# EAGLE board charlieplex_12_v1 (EAGLE 5.11)
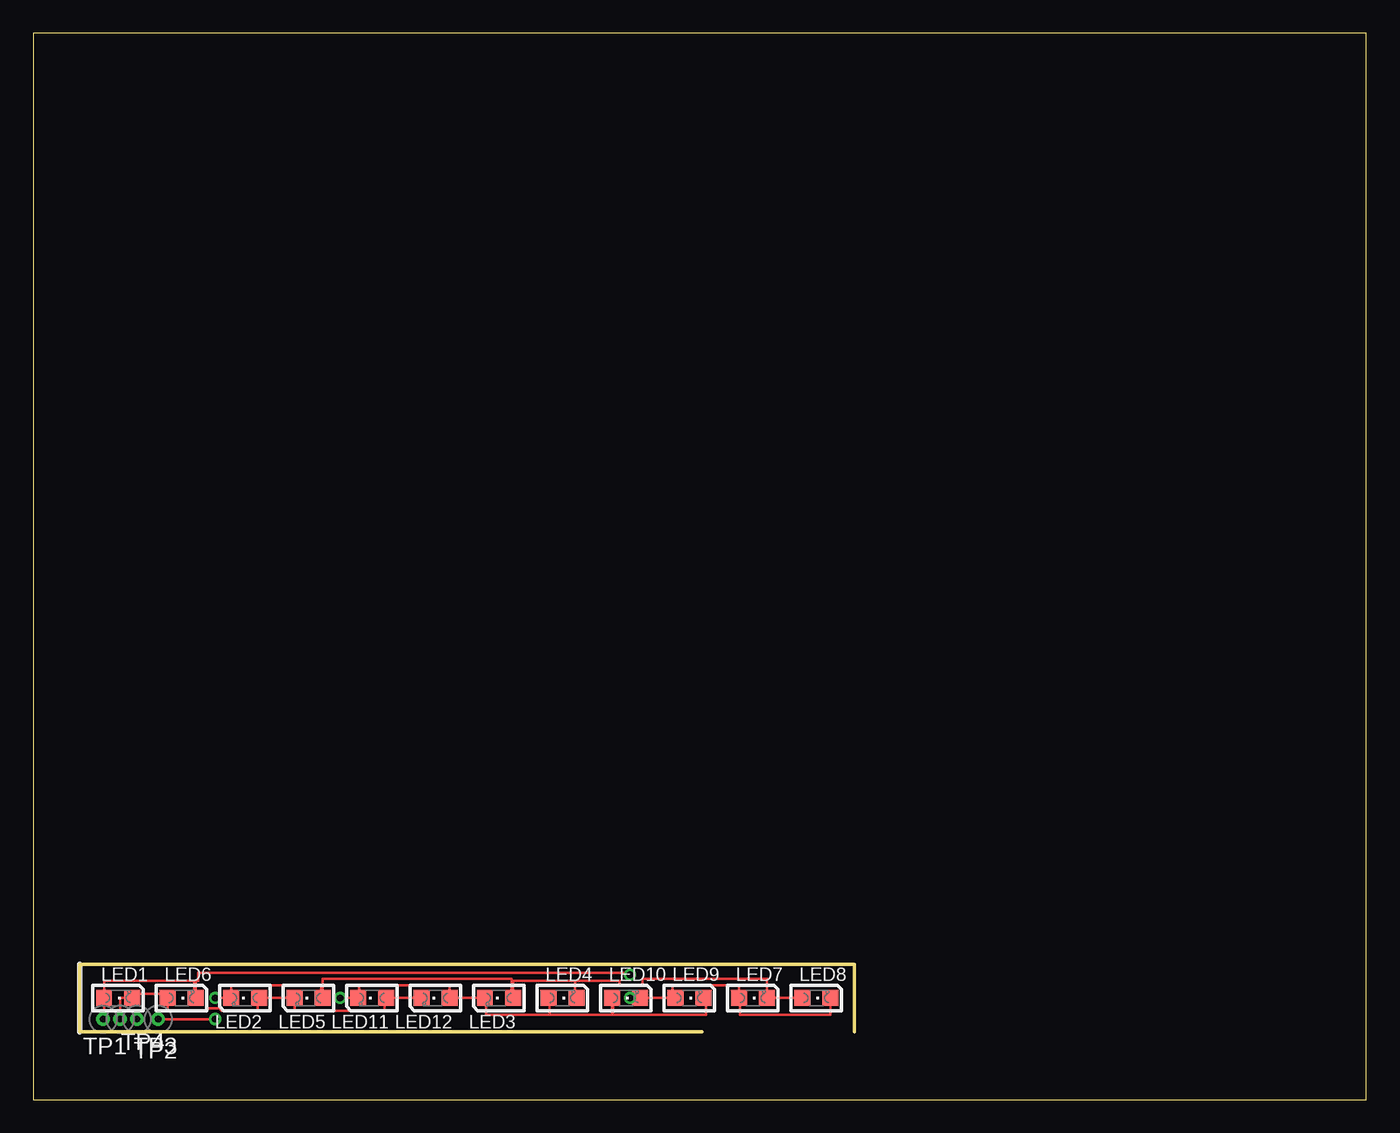
[diagram p0: board, top side]
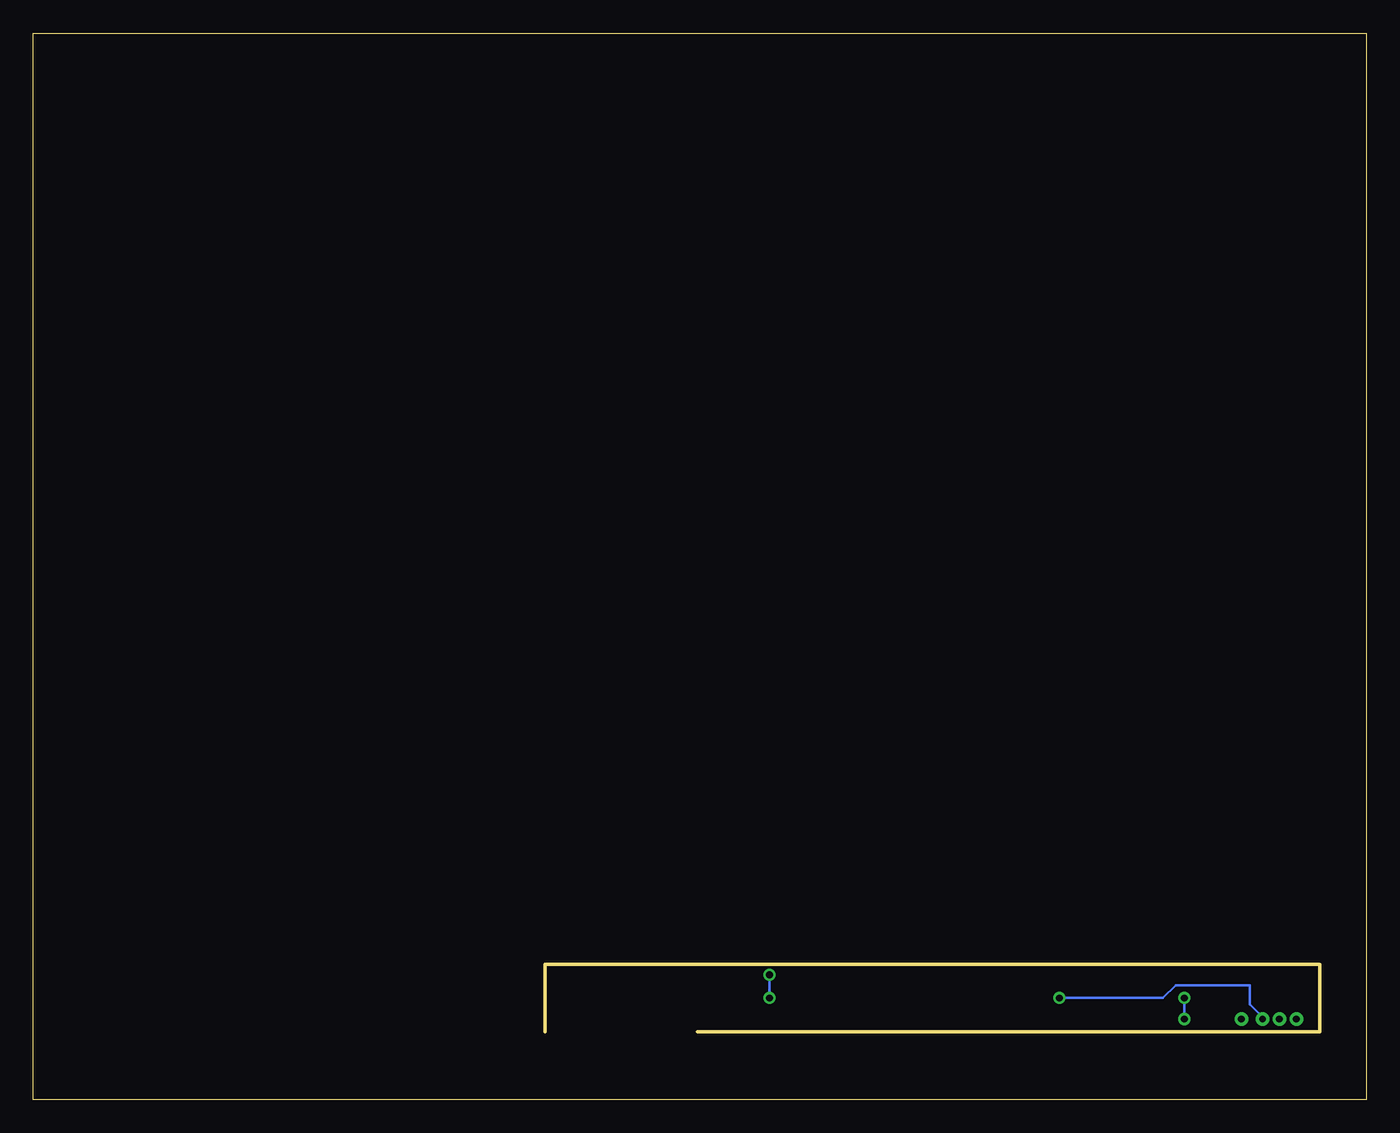
[diagram p1: board, bottom side, seen from below]

Size 100 x 80 mm. Coordinates in mm from the lower left corner, seen from the top.
Outline: 61.59,5.08 61.59,10.16 3.49,10.16 3.49,5.08 50.16,5.08
Outline: 0,0 100,0 100,80 0,80 0,0
Copper layers (1*16): Top 0.035mm / dielectric 1.5mm / Bottom 0.035mm
Design rules "default *": minimum track width 8mil, minimum drill 20mil, track to track 8mil, track to pad 8mil, pad to pad 8mil, via to via 8mil, smd to smd 8mil, copper to edge 40mil, drill to drill 8mil, minimum pad ring 10mil, minimum via ring 8mil, stop-mask expansion 4mil, vias tented up to drill 0mil, thermal gap 10mil

## Footprints (pad centres in the part's own frame; a part is rotated, then mirrored left to right if it is on the bottom)
LED_0805 = smd 1.2 x 1.2: A 0,-1.05; C 0,1.05
P1-20 = drill 0.508 round: TP 0,0

## Placement (x,y rotation side)
LED1  [LED_0805]  6.35,7.62 270 top
LED2  [LED_0805]  15.88,7.62 90 top
LED3  [LED_0805]  34.92,7.62 90 top
LED4  [LED_0805]  39.69,7.62 270 top
LED5  [LED_0805]  20.64,7.62 90 top
LED6  [LED_0805]  11.11,7.62 270 top
LED7  [LED_0805]  53.98,7.62 270 top
LED8  [LED_0805]  58.74,7.62 270 top
LED9  [LED_0805]  49.21,7.62 270 top
LED10  [LED_0805]  44.45,7.62 270 top
LED11  [LED_0805]  25.4,7.62 90 top
LED12  [LED_0805]  30.16,7.62 90 top
TP1  [P1-20]  5.24,6.03 0 top
TP2  [P1-20]  6.51,6.03 0 top
TP3  [P1-20]  9.37,6.03 0 top
TP4  [P1-20]  7.78,6.03 0 top

## Library data of the parts
LED1-LED12 TP1-TP4 = CyberRailGuru

## Nets
N$1: LED1.A LED6.C LED7.A LED8.C LED9.A LED10.C TP1.TP
N$2: LED1.C LED2.A LED5.C LED6.A LED11.A LED12.C TP2.TP
N$5: LED2.C LED3.A LED4.C LED5.A LED7.C LED8.A TP3.TP
N$6: LED3.C LED4.A LED9.C LED10.A LED11.C LED12.A TP4.TP

## Tracks (layer width: path | path; a pad name or v marks a point on that pad's centre or on a via)
N$1  (via drill 0.51)
  Top 0.203: LED8.C 59.79,6.35 53.02,6.35 53.02,7.62 LED7.A 52.92,8.57 47.94,8.57 47.94,7.62 LED9.A LED10.C v44.77,7.62 | v44.77,9.37 44.77,9.53 12.38,9.53 12.38,8.89 12.16,8.89 LED6.C 12.06,7.62 12.06,8.89 5.3,8.89 LED1.A 5.3,6.03 TP1.TP
  Bottom 0.203: v44.77,9.37 v44.77,7.62
N$2
  Top 0.203: 7.3,7.62 7.3,7.94 10.16,7.94 10.16,7.62 LED6.A 10.06,6.67 13.02,6.67 13.18,6.83 13.97,6.83 14.13,6.67 16.83,6.67 16.83,7.62 LED2.A LED5.C 19.59,6.67 26.35,6.67 26.35,7.62 LED11.A LED12.C | 7.3,7.62 LED1.C | 7.3,7.62 6.51,7.62 TP2.TP
N$5  (via drill 0.51)
  Top 0.203: LED8.A LED7.C 55.02,9.05 45.72,9.05 45.72,8.57 43.97,8.57 43.97,8.89 40.64,8.89 | 40.64,8.89 35.98,8.89 LED3.A 35.88,7.62 35.88,9.05 21.69,9.05 LED5.A 21.59,7.62 21.59,8.57 14.82,8.57 LED2.C v13.65,7.62 | 40.64,8.89 40.64,7.62 LED4.C | TP3.TP v13.65,6.03
  Bottom 0.203: v13.65,6.03 v13.65,7.62
N$6  (via drill 0.51)
  Top 0.203: 38.73,6.35 33.97,6.35 33.97,7.62 LED3.C LED12.A 31.21,8.57 24.45,8.57 24.45,7.62 LED11.C v23.02,7.62 | LED4.A 38.73,7.62 38.73,6.35 | 38.73,6.35 43.5,6.35 43.5,7.62 LED10.A 43.4,6.35 50.48,6.35 50.48,7.62 LED9.C
  Bottom 0.203: v23.02,7.62 15.24,7.62 14.29,8.57 8.73,8.57 8.73,7.3 8.73,7.14 | 8.73,7.14 | TP4.TP 7.78,6.19 8.73,7.14